# Altium PCB PCB1.PcbDoc
Units mil, origin at the board's own origin, x right, y up, seen from the top; angles counter-clockwise.
Board outline 6000 x 4000 mil, 2 copper layers (Top Layer, Bottom Layer); 10 components, 12 nets, 52 pads, 0 vias.
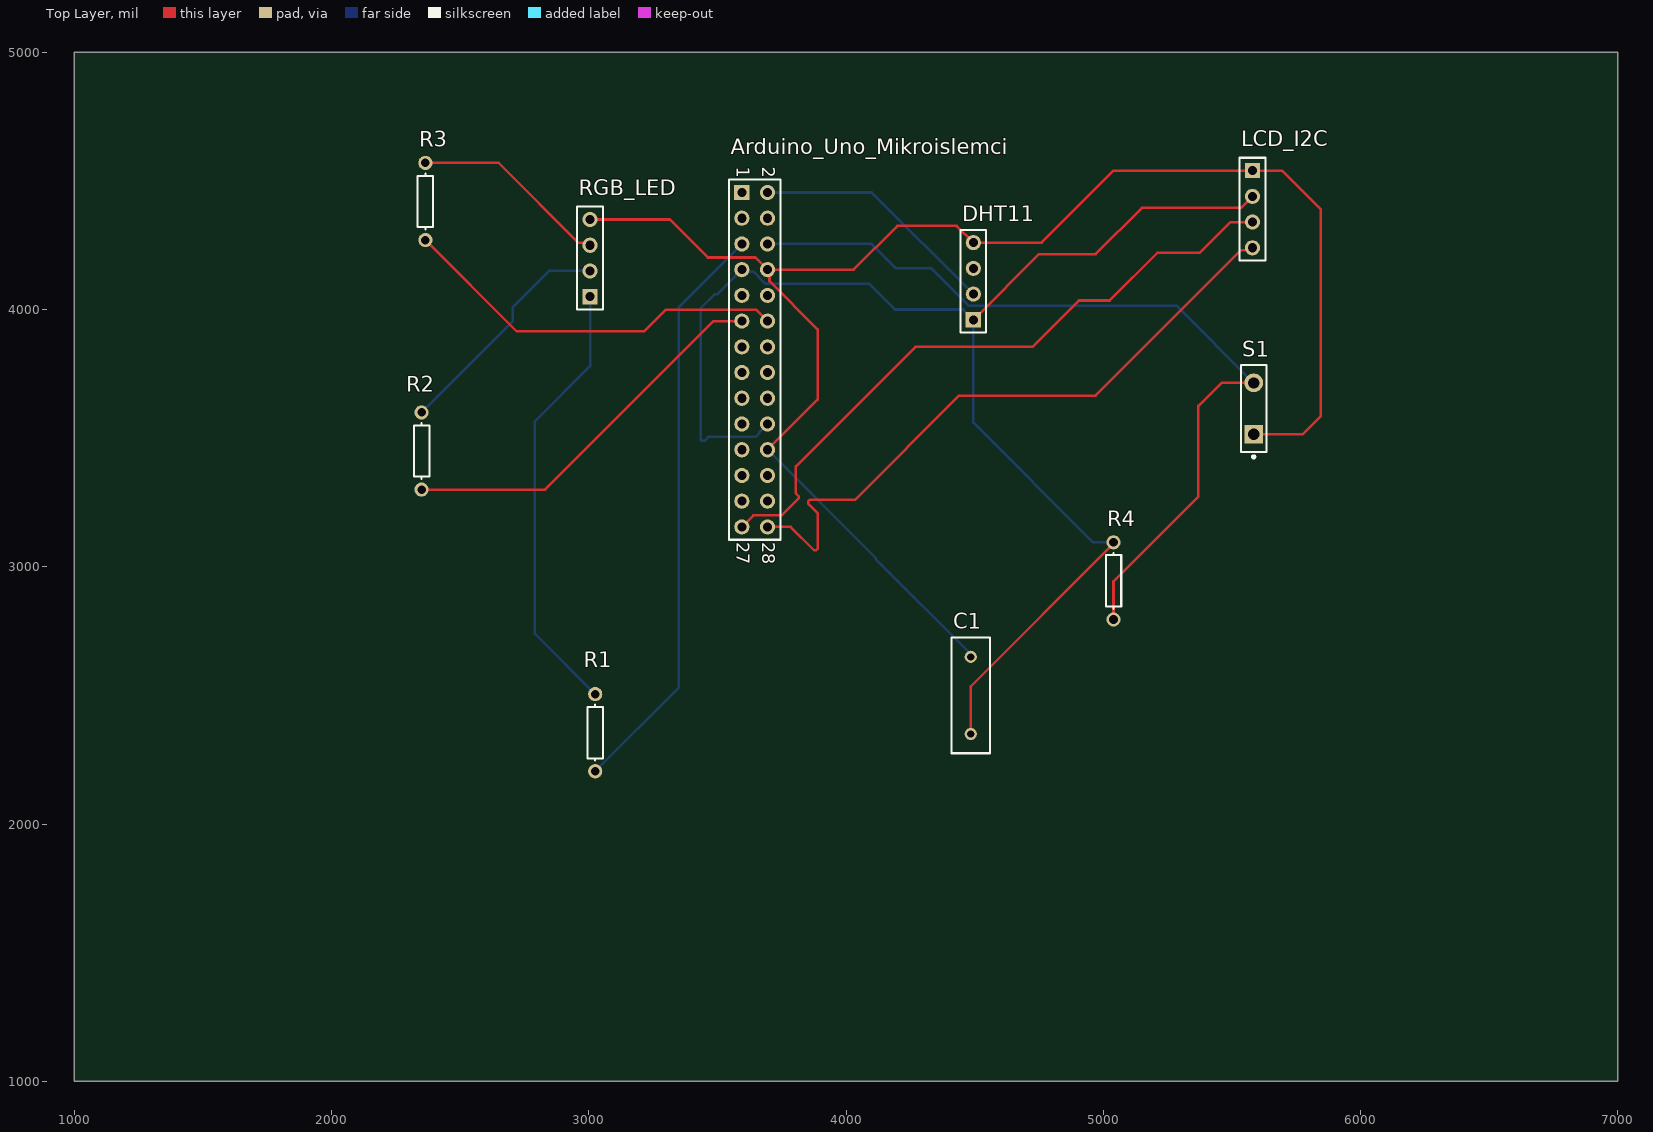
[diagram p0: Top Layer view]
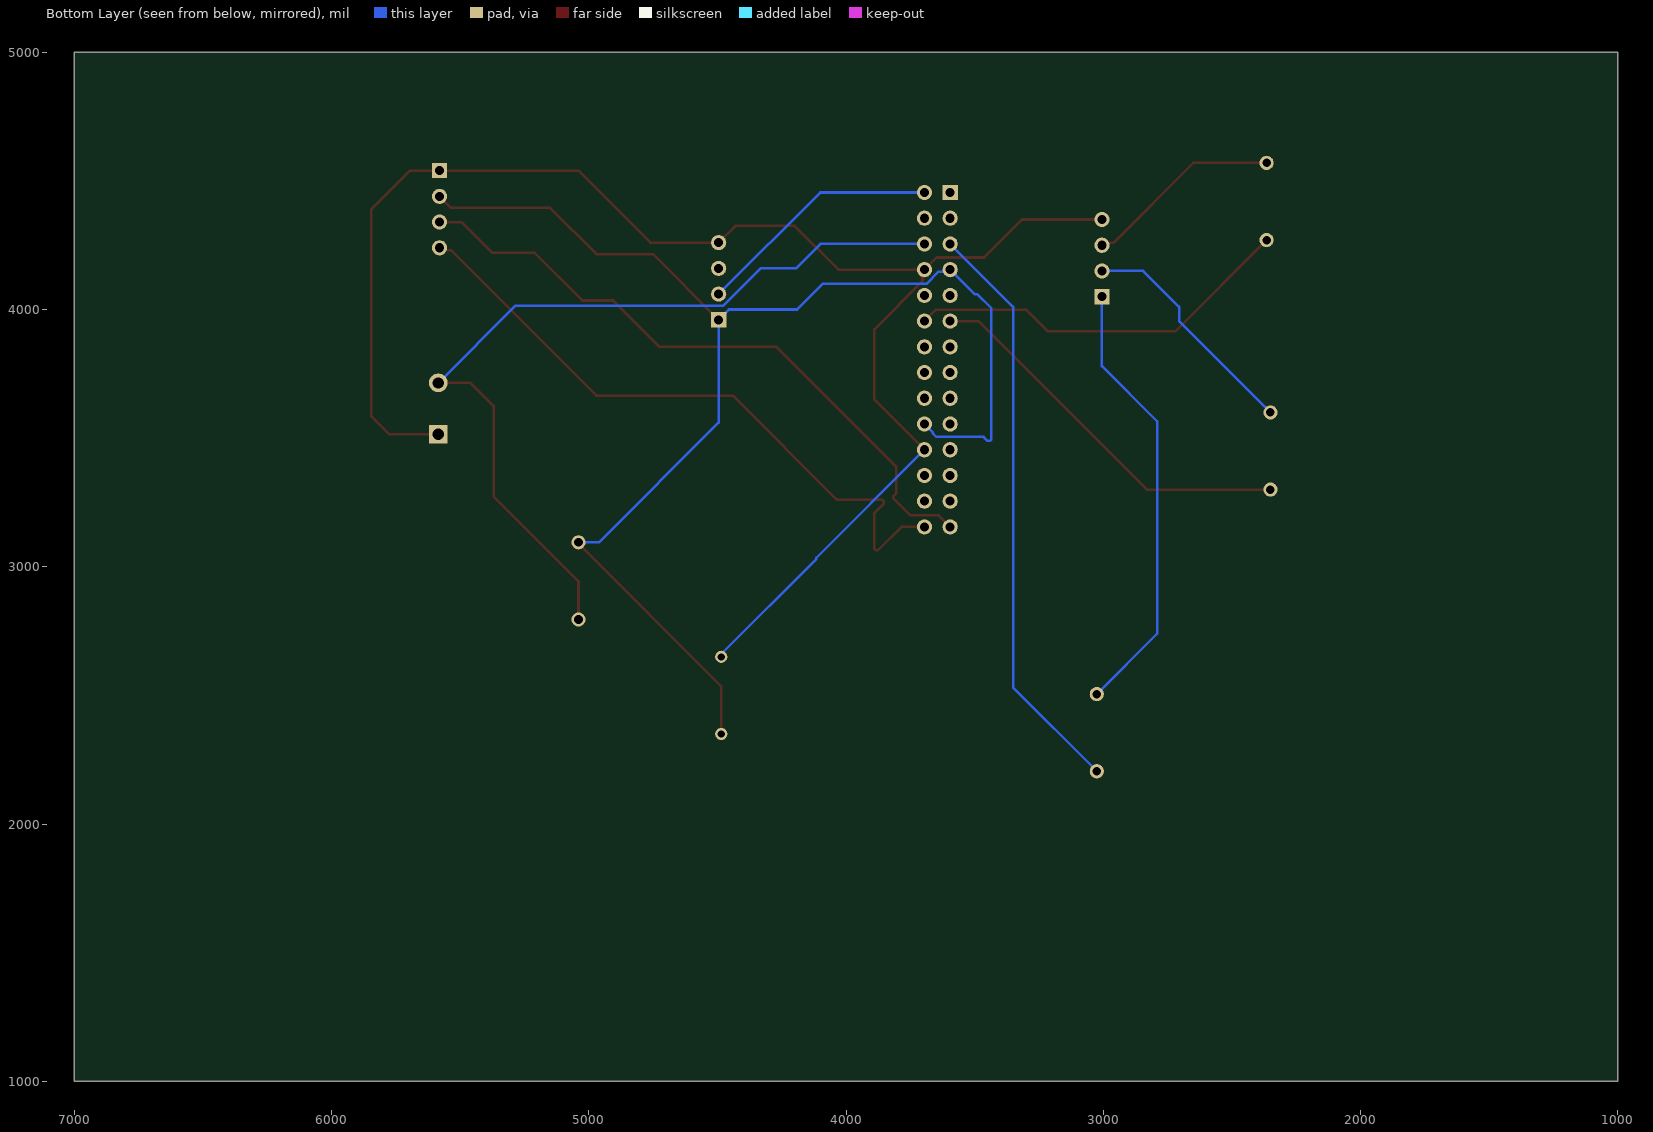
[diagram p1: Bottom Layer view, seen from below]

## Layer stack, top to bottom
Top Solder: solder mask 0.4, Solder Resist, Dk 3.5
Top Layer: signal copper 1.4
Dielectric 1: dielectric 12.6, FR-4, Dk 4.8
Bottom Layer: signal copper 1.4
Bottom Solder: solder mask 0.4, Solder Resist, Dk 3.5

## Board outline
1000,1000 7000,1000 7000,5000 1000,5000

## Design rules (kind name [scope] priority, off if disabled: settings)
Clearance [All] p1: gap=10 ignorepadtopadclearanceinfootprint=FALSE
PolygonConnect [All] p1: connectstyle=Relief reliefconductorwidth=10 reliefentries=4 polygonreliefangle="90 Angle" airgapwidth=10
RoutingVias [All] p1: holewidth=28 width=50 viastyle="Through Hole" minholewidth=28 minwidth=50 maxholewidth=28 maxwidth=50
SilkToSilkClearance [All] p1: silktosilkclearance=2
SilkToSolderMaskClearance [IsPad] p1: minsilkscreentomaskgap=8 clearancetoexposedcopper=TRUE
SolderMaskExpansion [All] p1: expansion=4 istentingtop=FALSE
SupplyNets "Schematic Supply Nets_1" [InNet('VCC')] p1: voltage=0.000
SupplyNets "Schematic Supply Nets" [InNet('GND')] p2: voltage=0.000
Width [All] p1: maxlimit=10 minlimit=10 preferedwidth=10
28 further rules are at their usual default settings.

## Classes and differential pairs
component class Sheet1: C1 DHT11 LCD_I2C R1 R2 R3 R4 RGB_LED S1

## Components (designator, comment, footprint, x,y, rotation, side; value= is the part's Value field where it differs from the comment)
Arduino_Uno_Mikroislemci "Header 14X2" HDR2X14 3595,4455 r270 top
C1 "Cap" RAD-0.3 4485,2500 r90 top value=100nF
DHT11 "Header 4" HDR1X4 4495,3960 r90 top
LCD_I2C "Header 4" HDR1X4 5580,4540 r270 top
R1 "Res1" AXIAL-0.3 3025,2355 r90 top value=330
R2 "Res1" AXIAL-0.3 2350,3450 r90 top value=330
R3 "Res1" AXIAL-0.3 2365,4420 r90 top value=330
R4 "Res1" AXIAL-0.3 5040,2945 r90 top value=10K
RGB_LED "Header 4" HDR1X4 3005,4050 r90 top
S1 "SW-PB" SPST-2 5585,3615 r90 top

## Footprints (in the part's own frame and the unit in brackets; to place one, negate y for a bottom-side part, rotate by r counter-clockwise, add the part's x,y. Pads: shape width x height; smd on the part's side, far side on the other; paste and mask are expansions set on the pad)
AXIAL-0.3 [mm] "Axial Device, Thru-Hole; 2 Leads; 0.3 in Pin Spacing"
  round 1.4 hole 0.85: 1(-3.81,0) 2(3.81,0)
  silkscreen extent -2.77,-0.76 2.77,0.76
HDR1X4 [mm] "Connector; Header; 4 Position"
  rect 1.5x1.5 hole 0.9: 1(0,0)
  round 1.5 hole 0.9: 2(2.54,0) 3(5.08,0) 4(7.62,0)
  silkscreen extent -1.27,-1.27 8.89,1.27
HDR2X14 [mm] "Connector; Header; 14x2 Position"
  rect 1.5x1.5 hole 0.9: 1(0,0)
  round 1.5 hole 0.9: 2(0,2.54) 3(2.54,0) 4(2.54,2.54) 5(5.08,0) 6(5.08,2.54) 7(7.62,0) 8(7.62,2.54) 9(10.16,0) 10(10.16,2.54) 11(12.7,0) 12(12.7,2.54) 13(15.24,0) 14(15.24,2.54) 15(17.78,0) 16(17.78,2.54) 17(20.32,0) 18(20.32,2.54) 19(22.86,0) 20(22.86,2.54) 21(25.4,0) 22(25.4,2.54) 23(27.94,0) 24(27.94,2.54) 25(30.48,0) 26(30.48,2.54) 27(33.02,0) 28(33.02,2.54)
  silkscreen extent -1.27,-1.27 34.29,3.81
RAD-0.3 [mm] "Radial Cap, Thru-Hole; 2 Leads; 0.3 in Pin Spacing"
  round 1.2 hole 0.7: 1(-3.81,0) 2(3.81,0)
  silkscreen extent -5.71,-1.91 5.71,1.91
SPST-2 [mm] "Switch; 2 Leads"
  rect 1.85x1.85 hole 1.1: 1(-2.54,0)
  round 1.85 hole 1.1: 2(2.54,0)
  silkscreen extent -4.89,-1.27 4.28,1.27

## Part data
Arduino_Uno_Mikroislemci: "Header, 14-Pin, Dual row", LatestRevisionDate=17-Jul-2002, LatestRevisionNote="Re-released for DXP Platform.", Publisher="Altium Limited"
C1: "Capacitor", LatestRevisionDate=17-Jul-2002, LatestRevisionNote="Re-released for DXP Platform.", PackageDescription="Radial Cap, Thru-Hole; 2 Leads; 0.3 in Pin Spacing", PackageReference=RAD-0.3, Published=8-Jun-2000, Publisher="Altium Limited"
DHT11 LCD_I2C RGB_LED: "Header, 4-Pin", LatestRevisionDate=17-Jul-2002, LatestRevisionNote="Re-released for DXP Platform.", Publisher="Altium Limited"
R1 R2 R3 R4: "Resistor", LatestRevisionDate=17-Jul-2002, LatestRevisionNote="Re-released for DXP Platform.", PackageDescription="Axial Device, Thru-Hole; 2 Leads; 0.3 in Pin Spacing", PackageReference=AXIAL-0.3, Published=8-Jun-2000, Publisher="Altium Limited"
S1: "Switch", LatestRevisionDate=17-Jul-2002, LatestRevisionNote="Re-released for DXP Platform.", PackageDescription="Switch; 2 Leads", PackageReference=SPST-2, Published=24-Mar-1999, Publisher="Altium Limited"

## Nets (pads, with @x,y where several pads share a name; then routed paths per layer and width w, separated by ;. In a path a pad name is that pad's centre, name@x,y a point inside that pad or via, vN(x,y) a via of type N, cw(c..) or ccw(c..) an arc to the next point about the centre after c; other vN are vias at no path point)
GND: Arduino_Uno_Mikroislemci.8 Arduino_Uno_Mikroislemci.22 C1.2 DHT11.4 LCD_I2C.1 RGB_LED.4 S1.1 | length 6284
  Top Layer w10: RGB_LED.4 3315,4350 3462.81,4202.19 3647.81,4202.19 Arduino_Uno_Mikroislemci.8 ; Arduino_Uno_Mikroislemci.22 3890,3650 3890,3922.97 3702.5,4110.47 3702.5,4147.5 Arduino_Uno_Mikroislemci.8 ; S1.1 5775,3515 5845,3585 5845,4390 5695,4540 LCD_I2C.1 5040,4540 4760,4260 DHT11.4 4430,4325 4200,4325 4030,4155 Arduino_Uno_Mikroislemci.8
  Bottom Layer w10: Arduino_Uno_Mikroislemci.22 4115,3035 4115,3030 4485,2660 C1.2
NetArduino_Uno_Mikroislemci_2: Arduino_Uno_Mikroislemci.2 DHT11.2 | length 963.6
  Bottom Layer w10: Arduino_Uno_Mikroislemci.2 4100,4455 DHT11.2
NetArduino_Uno_Mikroislemci_5: Arduino_Uno_Mikroislemci.5 R1.1 | length 2286.1
  Bottom Layer w10: R1.1 3350,2530 3350,4010 Arduino_Uno_Mikroislemci.5
NetArduino_Uno_Mikroislemci_6: Arduino_Uno_Mikroislemci.6 R4.1 S1.2 | length 3332.6
  Top Layer w10: R4.1 5040,2943.6 5370,3273.6 5370,3625 5460,3715 S1.2
  Bottom Layer w10: Arduino_Uno_Mikroislemci.6 4100,4255 4195,4160 4332.03,4160 4476.56,4015.47 5284.53,4015.47 S1.2
NetArduino_Uno_Mikroislemci_11: Arduino_Uno_Mikroislemci.11 R2.1 | length 1516.3
  Top Layer w10: R2.1 2830,3300 3485,3955 Arduino_Uno_Mikroislemci.11
NetArduino_Uno_Mikroislemci_12: Arduino_Uno_Mikroislemci.12 R3.1 | length 1530.5
  Top Layer w10: R3.1 2720,3915 3215,3915 3299.53,3999.53 3650.47,3999.53 Arduino_Uno_Mikroislemci.12
NetR1_2: R1.2 RGB_LED.1 | length 1743.6
  Bottom Layer w10: RGB_LED.1 3005,3780 2790,3565 2790,2740 R1.2 R1.2@3025,2517.21
NetR2_2: R2.2 RGB_LED.2 | length 915
  Bottom Layer w10: R2.2 2705,3955 2705,4010 2845,4150 RGB_LED.2
NetR3_2: R3.2 RGB_LED.3 | length 772.5
  Top Layer w10: R3.2 2650,4570 2960.61,4259.39 2995.61,4259.39 RGB_LED.3
SCL: Arduino_Uno_Mikroislemci.28 LCD_I2C.4 | length 2579.5
  Top Layer w10: Arduino_Uno_Mikroislemci.28@3701.24,3161.24 Arduino_Uno_Mikroislemci.28 3785,3155 3875.86,3064.14 3884.14,3064.14 3890,3070 3890,3208.28 3852.43,3245.86 3852.43,3254.14 3858.28,3260 4035,3260 4440,3665 4970,3665 5535.61,4230.61 5570.61,4230.61 LCD_I2C.4
SDA: Arduino_Uno_Mikroislemci.27 LCD_I2C.3 | length 2574.5
  Top Layer w10: Arduino_Uno_Mikroislemci.27@3602.5,3162.5 Arduino_Uno_Mikroislemci.27 3639.53,3199.53 3749.53,3199.53 3815.86,3265.86 3815.86,3274.14 3805,3285 3805,3390 4270,3855 4725,3855 4905,4035 5025,4035 5210,4220 5375,4220 5495,4340 LCD_I2C.3
VCC: Arduino_Uno_Mikroislemci.7 Arduino_Uno_Mikroislemci.20 C1.1 DHT11.1 LCD_I2C.2 R4.2 | length 5401.4
  Top Layer w10: C1.1 4485,2535 5040,3090 R4.2 ; DHT11.1 4750,4215 4970,4215 5150,4395 5535,4395 LCD_I2C.2
  Bottom Layer w10: Arduino_Uno_Mikroislemci.20 3663.51,3523.51 3663.51,3519.37 3649.14,3505 3465,3505 3449.14,3489.14 3440.86,3489.14 3435,3495 3435,4005 3490,4060 3500,4060 Arduino_Uno_Mikroislemci.7 3602.5,4147.5 3639.53,4147.5 3687.5,4099.53 4090.47,4099.53 4190,4000 4455,4000 DHT11.1 4495,3560 4960,3095 R4.2
pads on no net: Arduino_Uno_Mikroislemci.1 Arduino_Uno_Mikroislemci.3 Arduino_Uno_Mikroislemci.4 Arduino_Uno_Mikroislemci.9 Arduino_Uno_Mikroislemci.10 Arduino_Uno_Mikroislemci.13 Arduino_Uno_Mikroislemci.14 Arduino_Uno_Mikroislemci.15 Arduino_Uno_Mikroislemci.16 Arduino_Uno_Mikroislemci.17 Arduino_Uno_Mikroislemci.18 Arduino_Uno_Mikroislemci.19 Arduino_Uno_Mikroislemci.21 Arduino_Uno_Mikroislemci.23 Arduino_Uno_Mikroislemci.24 Arduino_Uno_Mikroislemci.25 Arduino_Uno_Mikroislemci.26 DHT11.3

## Text inside footprints (layer, text, board x,y; h text height)
Arduino_Uno_Mikroislemci: Top Overlay "2" at 3675,4555 h50 r270; Top Overlay "1" at 3575,4555 h50 r270; Top Overlay "27" at 3575,3095 h50 r270; Top Overlay "28" at 3675,3095 h50 r270